# EAGLE board oil water separator (EAGLE 7.5.0)
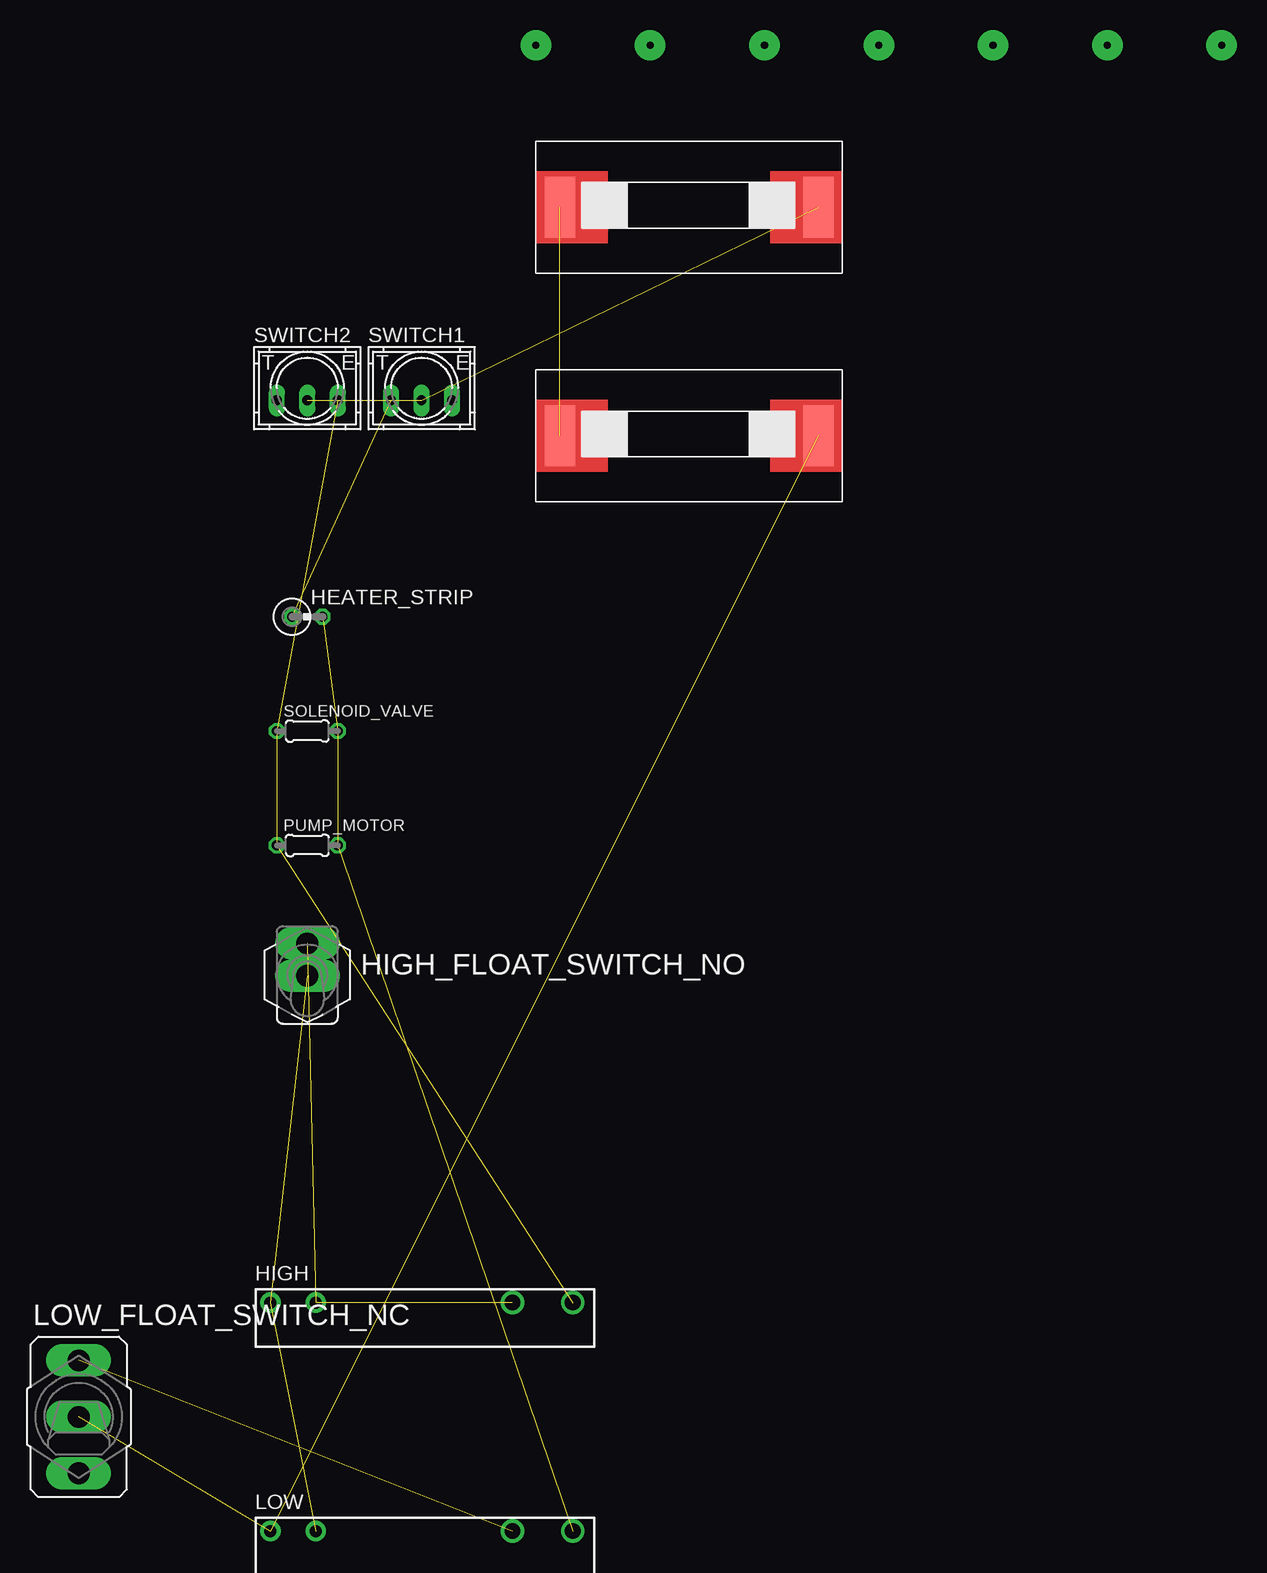
[diagram p0: board, top side]

No outline drawn. Coordinates in mm, seen from the top.
Copper layers (1*16): Top 0.035mm / dielectric 1.5mm / Bottom 0.035mm
Design rules "default": minimum track width 10mil, minimum drill 24mil, track to track 8mil, track to pad 8mil, pad to pad 8mil, via to via 8mil, smd to smd 8mil, copper to edge 40mil, drill to drill 8mil, minimum pad ring 10mil, minimum via ring 8mil, stop-mask expansion 4mil, vias tented up to drill 0mil, thermal gap 10mil

## Footprints (pad centres in the part's own frame; a part is rotated, then mirrored left to right if it is on the bottom)
0309V = drill 0.813 octagon: 1 -1.27,0; 2 1.27,0
APF30212A = drill 1 pad 1.7: 1 -12.6,0; 2 -8.82,0 | drill 1.3 pad 1.9: COM 7.56,0; NO 12.6,0
MS243 = drill 1.803 pad 2 long: 1 0,-1.346; 2 0,1.346
M9040P = drill 1.803 long: 1 0,4.699; 2 0,0; 3 0,-4.699
0204/5 = drill 0.813 octagon: 1 -2.54,0; 2 2.54,0
9077-1 = drill 0.813 long: 1 -2.54,-1.016; 2 0,-1.016; 3 2.54,-1.016
FUSE = smd 2.54 x 5.08: P$1 2,5.54; P$2 23.54,5.54

## Placement (x,y rotation side)
HEATER_STRIP  [0309V]  0,-9.53 0 top
HIGH  APF30212A  [APF30212A]  9.53,-66.67 0 top
HIGH_FLOAT_SWITCH_NO  [MS243]  0,-38.1 0 top
LOW  APF30212A  [APF30212A]  9.53,-85.72 0 top
LOW_FLOAT_SWITCH_NC  [M9040P]  -19.05,-76.2 0 top
PUMP_MOTOR  [0204/5]  0,-28.57 0 top
SOLENOID_VALVE  [0204/5]  0,-19.05 0 top
SWITCH1  toggle  [9077-1]  9.53,9.53 0 top
SWITCH2  Momentary  [9077-1]  0,9.53 0 top
U$1  FUSE(SM)  [FUSE]  19.05,19.05 0 top
U$2  FUSE(SM)  [FUSE]  19.05,0 0 top

## Library data of the parts
HEATER_STRIP PUMP_MOTOR SOLENOID_VALVE U$1 U$2 = 1 Dan's Common Parts
HIGH LOW = relay; OC_FARNELL: unknown
HIGH_FLOAT_SWITCH_NO LOW_FLOAT_SWITCH_NC = switch
SWITCH1 SWITCH2 = switch-misc

## Nets
N$1: HEATER_STRIP.2 LOW.NO PUMP_MOTOR.2 SOLENOID_VALVE.2
N$2: U$1.P$1 U$2.P$1
N$3: HIGH.1 HIGH_FLOAT_SWITCH_NO.1 LOW.2
N$4: SWITCH1.2 SWITCH2.2 U$1.P$2
N$5: HEATER_STRIP.1 SWITCH1.1
N$6: HIGH.2 HIGH.COM HIGH_FLOAT_SWITCH_NO.2
N$7: LOW.1 LOW_FLOAT_SWITCH_NC.2 U$2.P$2
N$8: HIGH.NO PUMP_MOTOR.1 SOLENOID_VALVE.1 SWITCH2.3
N$10: LOW.COM LOW_FLOAT_SWITCH_NC.1

## Tracks (layer width: path | path; a pad name or v marks a point on that pad's centre or on a via)
N$1  (3 unrouted)
N$2  (1 unrouted)
N$3  (2 unrouted)
N$4  (2 unrouted)
N$5  (1 unrouted)
N$6  (2 unrouted)
N$7  (2 unrouted)
N$8  (3 unrouted)
N$10  (1 unrouted)
S$1  (via drill 0.6 pad 2.54)
  other vias: 19.05,38.1
S$2  (via drill 0.6 pad 2.54)
  other vias: 28.57,38.1
S$3  (via drill 0.6 pad 2.54)
  other vias: 38.1,38.1
S$4  (via drill 0.6 pad 2.54)
  other vias: 47.62,38.1
S$5  (via drill 0.6 pad 2.54)
  other vias: 57.15,38.1
S$6  (via drill 0.6 pad 2.54)
  other vias: 66.67,38.1
S$7  (via drill 0.6 pad 2.54)
  other vias: 76.2,38.1